# Altium PCB PCB1.PcbDoc
Units mm, origin at the board's own origin, x right, y up, seen from the top; angles counter-clockwise.
Board outline 76.58 x 73.41 mm, 2 copper layers (Top Layer, Bottom Layer); 10 components, 9 nets, 67 pads, 4 vias.
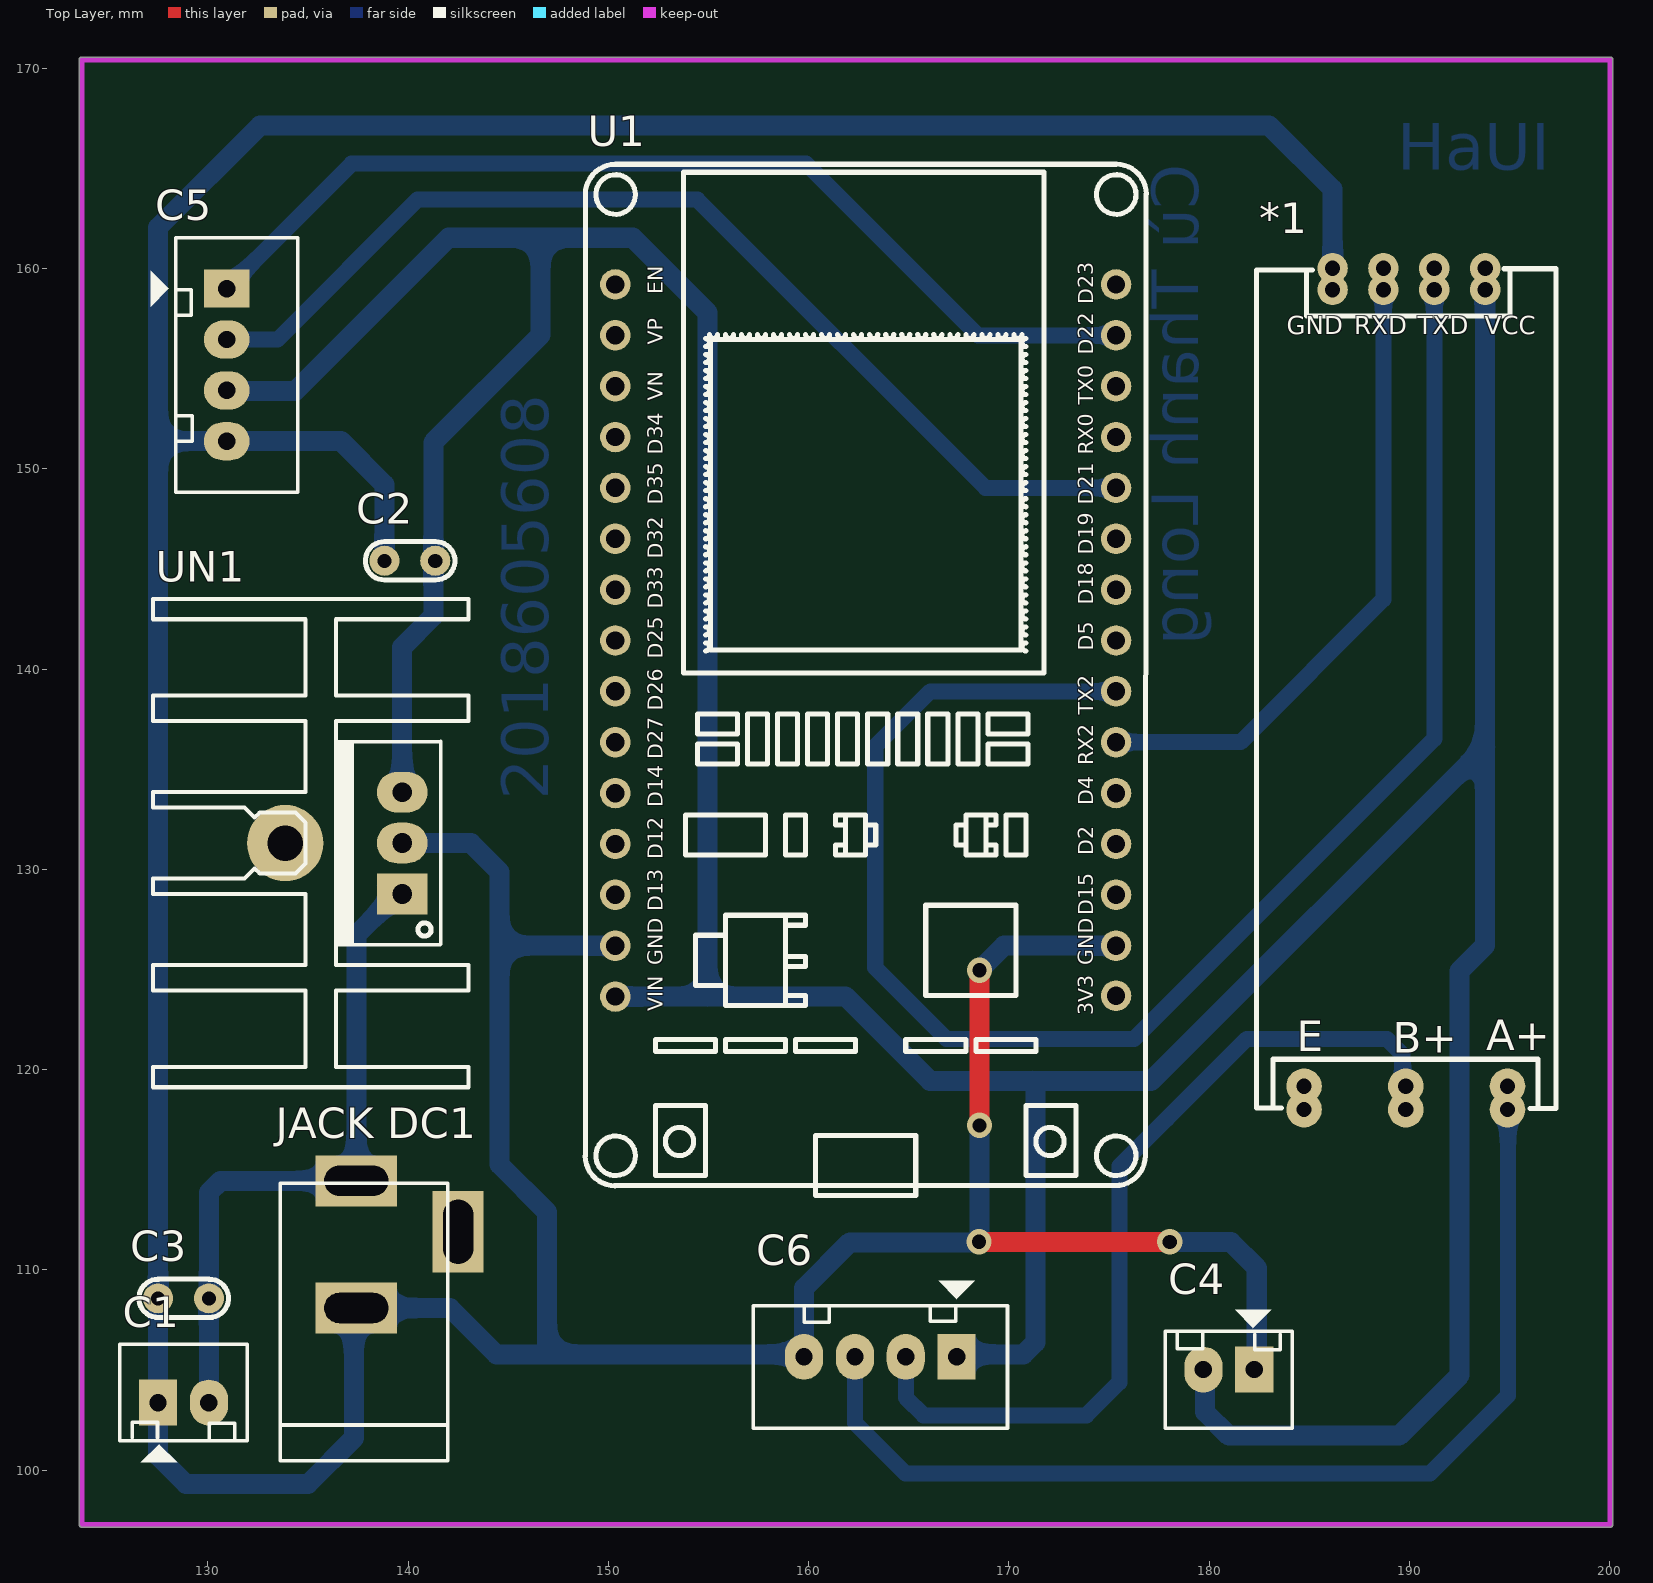
[diagram p0: Top Layer view]
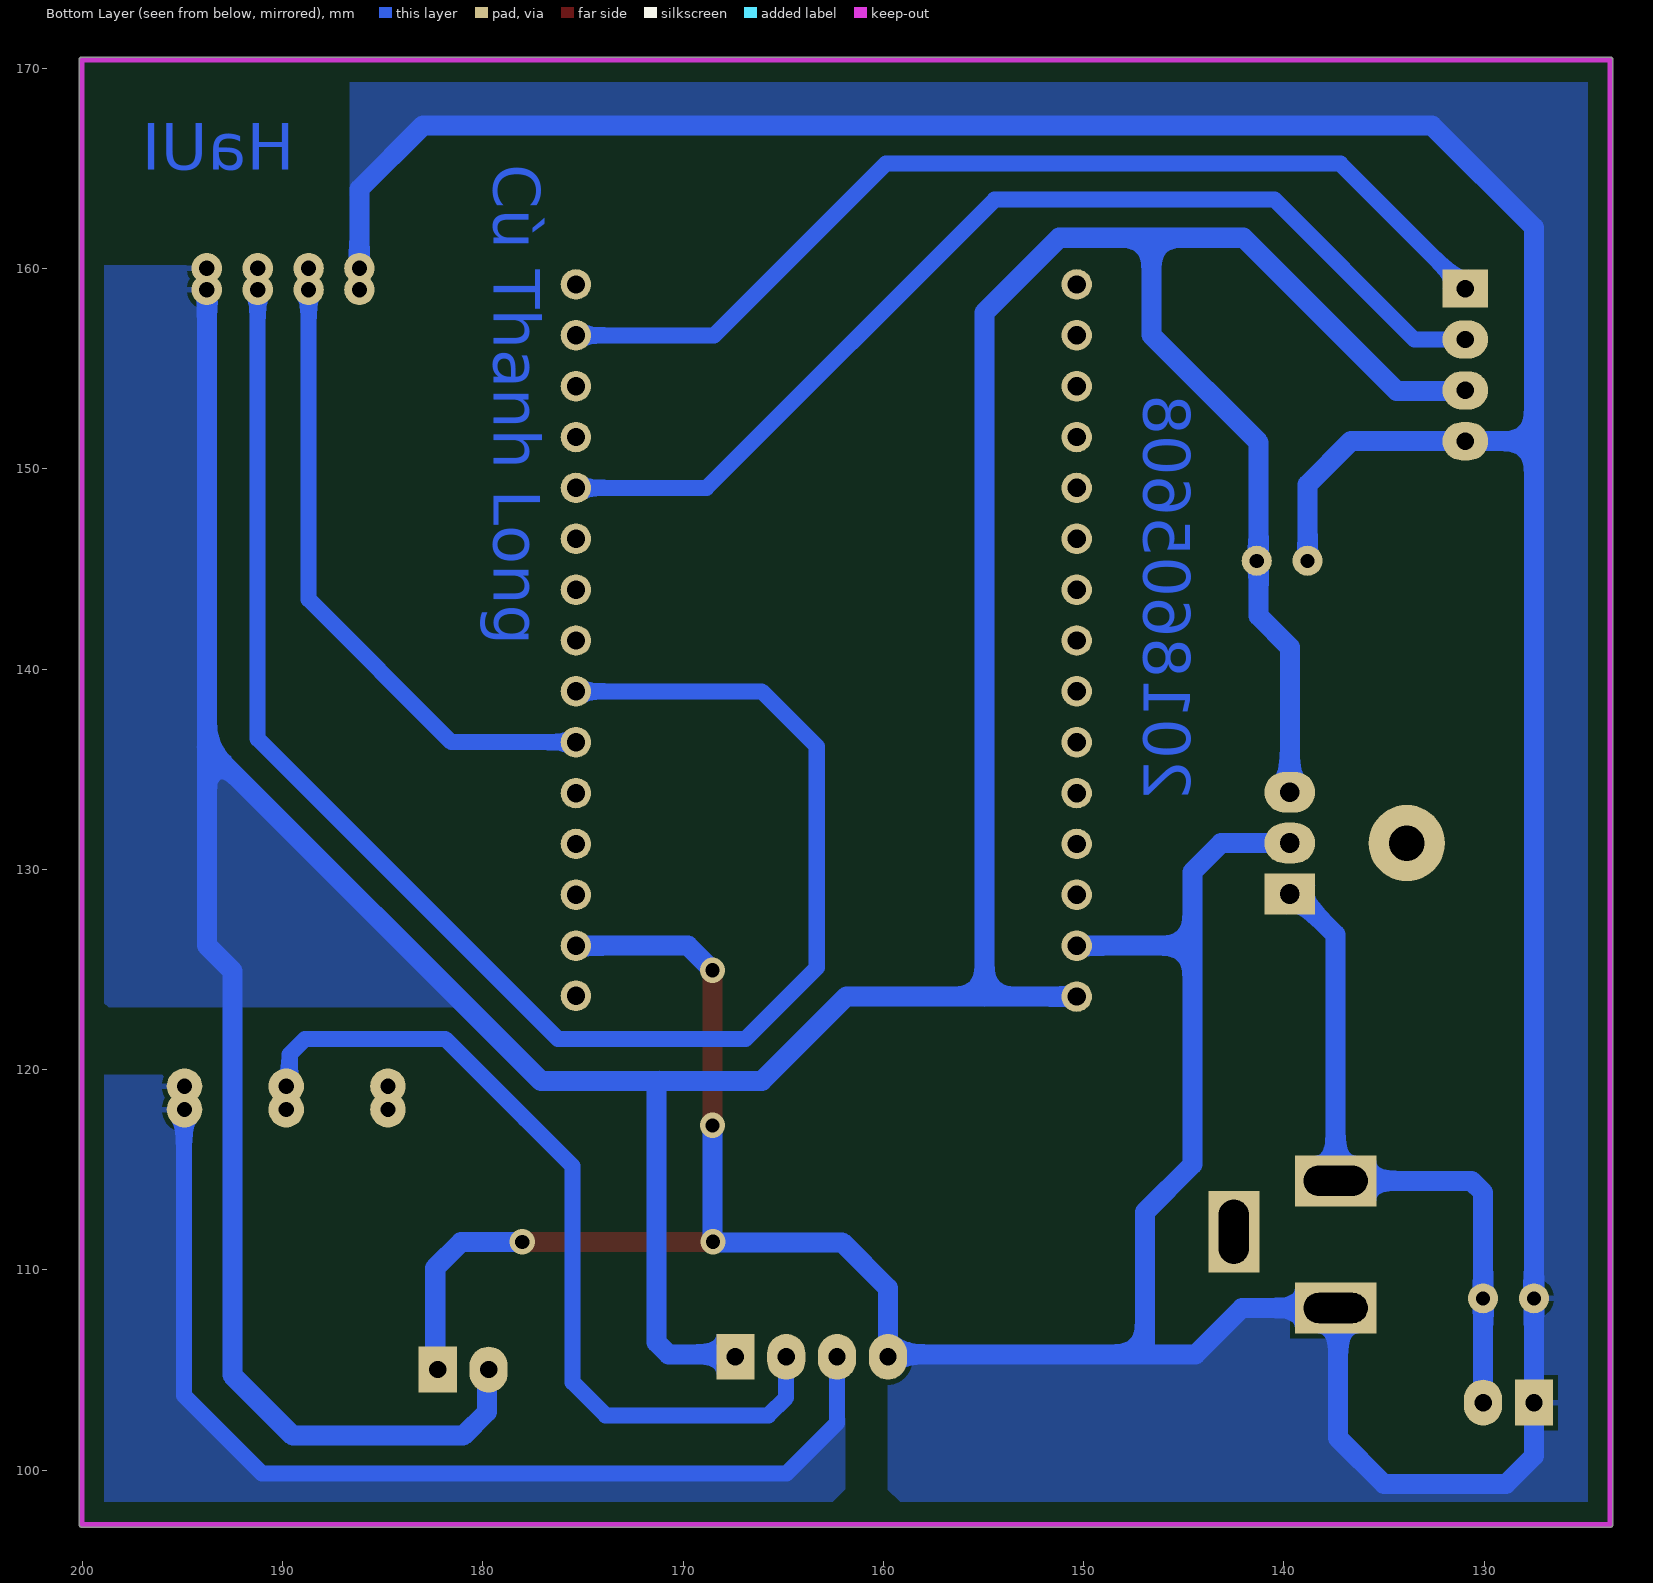
[diagram p1: Bottom Layer view, seen from below]

## Layer stack, top to bottom
Top Solder: solder mask 0.0102, Solder Resist, Dk 3.5
Top Layer: signal copper 0.0356
Dielectric 1: dielectric 0.32, FR-4, Dk 4.8
Bottom Layer: signal copper 0.0356
Bottom Solder: solder mask 0.0102, Solder Resist, Dk 3.5

## Board outline
123.571,97.282 123.571,170.434 cw(c123.698,170.434) 123.698,170.561 200.025,170.561 cw(c200.025,170.434) 200.152,170.434 200.152,97.282 cw(c200.025,97.282) 200.025,97.155 123.698,97.155 cw(c123.698,97.282)

## Design rules (kind name [scope] priority, off if disabled: settings)
Clearance [All] p1: gap=1 ignorepadtopadclearanceinfootprint=FALSE
PolygonConnect [All] p1: connectstyle=Relief reliefconductorwidth=0.254 reliefentries=4 polygonreliefangle="90 Angle" airgapwidth=0.254
RoutingVias [All] p1: holewidth=0.711 width=1.27 viastyle="Through Hole" minholewidth=0.711 minwidth=1.27 maxholewidth=0.711 maxwidth=1.27
SolderMaskExpansion [All] p1: expansion=0.102 istentingtop=FALSE
Width VCC5 [InNet('VCC5')] p1: maxlimit=1 minlimit=1 preferedwidth=1
Width VCC_IN [InNet('VCC_IN')] p2: maxlimit=1 minlimit=1 preferedwidth=1
Width VCC33 [InNet('VCC5')] p3: maxlimit=1 minlimit=1 preferedwidth=1
Width GND [InNet('GND')] p4: maxlimit=1 minlimit=1 preferedwidth=1
Width [All] p5: maxlimit=0.8 minlimit=0.8 preferedwidth=0.8
30 further rules are at their usual default settings.

## Components (designator, comment, footprint, x,y, rotation, side; value= is the part's Value field where it differs from the comment)
*1 "TTL_RS485" "RS-485 Module" 189.497,136.906 r270 top
C1 "Header2" Header2 127.508,103.378 r0 top
C2 "104" "tu gom" 140.081,145.415 r180 top
C3 "104" "tu gom" 128.778,108.585 r180 top
C4 "Header2" Header2 182.245,105.029 r180 top
C5 "LCD_I2C" Header4 130.937,159.004 r270 top
C6 "LCD_I2C" Header4 167.386,105.664 r180 top
"JACK DC1" "JACK DC 5.5" "JACK DC 5.5" 139.954,111.277 r90 top value="Jac DC"
U1 "ESP32_MODULE copy" ESP32-WIFIMODULE-FOOTPRINT 164.973,139.7 r0 top
UN1 "L78M05CP" QTO-220H2 139.7,131.318 r90 top

## Footprints (in the part's own frame and the unit in brackets; to place one, negate y for a bottom-side part, rotate by r counter-clockwise, add the part's x,y. Pads: shape width x height; smd on the part's side, far side on the other; paste and mask are expansions set on the pad)
ESP32-WIFIMODULE-FOOTPRINT [mil]
  round 60 hole 36: 1(-575.9,768.25) 2(-575.9,668.25) 3(-575.9,568.25) 4(-575.9,468.25) 5(-575.9,368.25) 6(-575.9,268.25) 7(-575.9,168.25) 8(-575.9,68.25) 9(-575.9,-31.75) 10(-575.9,-131.75) 11(-575.9,-231.75) 12(-575.9,-331.75) 13(-575.9,-431.75) 14(-575.9,-531.75) 15(-575.9,-631.75) 16(408.35,-630.18) 17(408.35,-531.75) 18(408.35,-431.75) 19(408.35,-331.75) 20(408.35,-231.75) 21(408.35,-131.75) 22(408.35,-31.75) 23(408.35,68.25) 24(408.35,168.25) 25(408.35,268.25) 26(408.35,368.25) 27(408.35,468.25) 28(408.35,568.25) 29(408.35,668.25) 30(408.35,768.25)
  silkscreen extent -635,-1023 468,1005
Header2 [mil] "CON2"
  rect 75x90 hole 34: 1(0,0)
  oval 75x90 hole 34: 2(100,0)
  silkscreen extent -75,-118 175,115, body extent -68,-70 168,107, height 236
Header4 [mil] "CON4"
  rect 75x90 hole 34: 1(0,0)
  oval 75x90 hole 34: 2(100,0) 3(200,0) 4(300,0)
  silkscreen extent -100,-150 400,140, body extent -90,-90 398,136, height 276
"JACK DC 5.5" [mm] "Jac DC input"
  rect 2.54x4.064 hole 1.5 slot 3.2 at 90 deg: 1(3.175,2.54) 2(-3.175,2.54)
  rect 4.064x2.54 hole 1.5 slot 3.2 at 0 deg: 3(0.635,-2.54)
  silkscreen extent -10.79,-2.03 3.05,6.35, body extent -10.42,-2.67 3.4,6.84, height 11.02
QTO-220H2 [mil] "TO-220 - 1-2-3"
  round 150 hole 70: 0(0,230)
  rect 80x100 hole 39: 1(-100,0)
  oval 80x100 hole 39: 2(0,0) 3(100,0)
  silkscreen extent -480,-130 480,490, body extent -449,-177 453,469, height 1206
"RS-485 Module" [mil] "RS-485 TTL Module"
  round 60 hole 30: 1(-910,168.5) 1(-868,168.5) 2(-910,68.5) 2(-868,68.5) 3(-910,-31.5) 3(-868,-31.5) 4(-910,-131.5) 4(-868,-131.5)
  round 70 hole 30: 5(698,-187.5) 5(744,-187.5) 6(698,12.5) 6(744,12.5) 7(698,212.5) 7(744,212.5)
  silkscreen extent -909,-281 742,308, body extent -949,-282 808,310, height 110
"tu gom" [mm] "Tu gom mini"
  round 1.5 hole 0.7: 1(-1.27,0) 2(1.27,0)
  silkscreen extent -2.25,-0.97 2.22,0.97, body extent -2.92,-0.85 2.92,0.85, height 6.12

## Part data
C1 C4: "Header IDC, 2 x 1 Pin Vertical 2.54mm Pitch (Non-Boxed, Male)", Manufacturer="W¨¹rth Elektronik eiSos GmbH", partNo=613002143121, ComponentLink1 Description=Manufacturer, ComponentLink1URL=http://www.we-online.com, ComponentLink2 Description=Datasheet, ComponentLink2URL=http://katalog.we-online.de/em/datasheet/6130xx143121.pdf, Created by="Karrer Zheng", Created Date="29 March 2013", NoPins=02
C2 C3: library part "Tu gom 104 50V", "Cắm", Chung_Loai=Cắm, Don_Vi=Con, Ma_Hang=MH004761, So_Chan=2, Ten_Linh_Kien="Tụ gốm 104 100nF 50V"
C5 C6: library part Header4, "Header IDC, 4 x 1 Pin Vertical 2.54mm Pitch (Non-Boxed, Male)", Manufacturer="W¨¹rth Elektronik eiSos GmbH", partNo=613002143121, ComponentLink1 Description=Manufacturer, ComponentLink1URL=http://www.we-online.com, ComponentLink2 Description=Datasheet, ComponentLink2URL=http://katalog.we-online.de/em/datasheet/6130xx143121.pdf, Created by="Karrer Zheng", Created Date="29 March 2013", NoPins=02
UN1: "Positive Voltage Regulator", ComponentLink1Description="Manufacturer Link", ComponentLink1URL=http://www.st.com/, ComponentLink2Description=Datasheet, ComponentLink2URL=http://www.st.com/stonline/products/literature/ds/2146/l78m05c.pdf, DatasheetVersion=Apr-1994, LatestRevisionDate=17-Jul-2002, LatestRevisionNote="Re-released for DXP Platform.", Note="Tab is connected to pin 3 (GND).", PackageDescription="TO, Thru-Hole, Vertical, Heatsink Mounted; 3 In-Line Leads; Pitch 2.54 mm; Pin sequence 1, 3, 2", PackageReference=ISOWATT220AB, PackageVersion=Jul-1998, Published=24-Aug-2001, Publisher="Altium Limited"

## Via types
v1: diameter 1.27, hole 0.711, Top Layer to Bottom Layer, 4 vias

## Nets (pads, with @x,y where several pads share a name; then routed paths per layer and width w, separated by ;. In a path a pad name is that pad's centre, name@x,y a point inside that pad or via, vN(x,y) a via of type N, cw(c..) or ccw(c..) an arc to the next point about the centre after c; other vN are vias at no path point)
GND: "JACK DC1.2" *1.4 C1.1 C2.2 C3.2 C4.1 C5.4 C6.4 U1.14 U1.17 UN1.2 | length 274.5
  Top Layer w1: v1(168.503,111.405) 168.506,111.402 178.031,111.402 v1(178.033,111.4) ; v1(168.529,117.221) v1(168.529,124.968)
  Bottom Layer w1: C2.2 138.811,149.225 136.652,151.384 C5.4 127.508,151.384 ; UN1.2 143.129,131.318 144.562,129.885 144.562,126.194 ; 146.939,105.791 159.639,105.791 C6.4 159.766,109.093 162.052,111.379 168.477,111.379 v1(168.503,111.405) 168.529,111.431 v1(168.529,117.221) ; U1.14 144.562,126.194 ; v1(168.529,124.968) 169.755,126.194 U1.17 ; v1(178.033,111.4) 181.081,111.4 182.372,110.109 182.372,105.156 C4.1 ; *1.4@186.157,160.02 186.157,163.982 182.995,167.144 132.6,167.144 127.508,162.052 127.508,151.384 ; 127.508,151.384 C3.2 C1.1 127.508,100.711 128.905,99.314 135.001,99.314 137.287,101.6 137.287,107.975 137.414,108.102 142.088,108.102 144.407,105.783 146.939,105.783 146.939,112.891 144.562,115.268 144.562,126.194
RS485_A+: *1.7 C6.3 | length 52.9
  Bottom Layer w0.8: C6.3 162.306,102.362 164.841,99.827 191.013,99.827 194.92,103.734 194.92,117.983 *1.7@194.894,118.008
RS485_B-: *1.6 C6.2 | length 45
  Bottom Layer w0.8: C6.2@164.846,106.254 164.846,103.632 165.735,102.743 173.863,102.743 175.514,104.394 175.514,115.185 177.872,117.544 177.889,117.544 181.884,121.539 188.874,121.539 189.645,120.768 189.645,119.346 189.814,119.177 *1.6@189.814,118.008
RX2: *1.3 U1.21 | length 31.8
  Bottom Layer w0.8: U1.21 181.566,136.354 188.697,143.485 *1.3@188.697,158.953
SCL: C5.1 U1.29 | length 50.7
  Bottom Layer w0.8: C5.1 131.127,159.004 131.68,159.556 131.68,159.747 137.177,165.244 159.876,165.244 168.446,156.674 U1.29
SDA: C5.2 U1.26 | length 53.3
  Bottom Layer w0.8: C5.2 133.477,156.464 140.457,163.444 154.437,163.444 168.827,149.054 U1.26
TX2: *1.2 U1.22 | length 82.2
  Bottom Layer w0.8: U1.22 166.072,138.894 163.322,136.144 163.322,125.095 166.886,121.531 176.241,121.531 191.237,136.528 *1.2@191.237,158.953
VCC5: *1.1 C2.1 C4.2 C5.3 C6.1 U1.15 UN1.3 | length 234.3
  Bottom Layer w1: C5.3 130.968,153.893 134.36,153.893 142.011,161.544 146.612,161.544 ; UN1.3 139.7,141.097 141.255,142.652 141.255,145.319 C2.1 141.255,145.511 141.255,151.327 146.612,156.684 146.612,161.544 ; U1.15 154.94,123.654 ; C6.1 167.711,105.664 167.838,105.791 170.727,105.791 171.313,106.377 171.313,119.327 171.196,119.444 ; C4.2 179.792,104.942 179.792,102.91 180.975,101.727 189.484,101.727 192.505,104.748 192.505,124.941 193.777,126.213 193.777,136.119 ; *1.1@193.777,158.953 193.777,136.119 ; 146.612,161.544 151.213,161.544 154.94,157.817 154.94,123.654 ; 154.94,123.654 161.842,123.654 166.053,119.444 171.196,119.444 ; 171.196,119.444 177.102,119.444 193.777,136.119
VCC_IN: "JACK DC1.1" C1.2 C3.1 UN1.1 | length 33
  Bottom Layer w1: C1.2 C3.1@130.048,108.107 ; C3.1 130.048,113.867 130.634,114.452 137.414,114.452 137.414,126.746 139.446,128.778 UN1.1
pads on no net: "JACK DC1.3" *1.5 U1.1 U1.2 U1.3 U1.4 U1.5 U1.6 U1.7 U1.8 U1.9 U1.10 U1.11 U1.12 U1.13 U1.16 U1.18 U1.19 U1.20 U1.23 U1.24 U1.25 U1.27 U1.28 U1.30 UN1.0

## Polygon pours and split planes (outlines as drawn)
RS485_A+ on Bottom Layer "RS485_A+_L02_P004" (solid, pour order 4): 161.9,99.06 162.535,98.425 200.076,98.425 200.076,119.761 195.478,119.761 194.894,119.177 194.92,119.151 194.92,103.734 191.013,99.827 164.841,99.827 161.9,102.768
VCC5 on Bottom Layer "VCC5_L02_P002" (solid, pour order 2): 193.777,160.172 200,160.172 200,124.435 198.679,123.114 185.725,123.114 180.746,123.114 193.751,136.119 193.777,136.119
GND on Bottom Layer "GND_L02_P001" (solid, pour order 1): 186.639,170.434 123.673,170.434 123.673,97.307 158.039,97.307 159.766,99.035 159.766,105.664 144.526,105.664 142.088,108.102 137.414,108.102 137.287,107.975 137.287,101.6 135.001,99.314 128.905,99.314 127.508,100.711 127.508,162.052 132.6,167.144 182.995,167.144 186.639,163.5

## Keep-outs
Keep-Out Layer:
  lines w0.254: 123.698,97.282 123.698,170.434 200.025,170.434 200.025,97.282 123.698,97.282

## Other copper
Bottom Layer:
  text "Cù Thanh Long" at 180.22,165.227 h4 r90
  text "HaUI" at 189.382,164.154 h4
  text "2018605608" at 147.78,133.477 h4 r90

## Text inside footprints (layer, text, board x,y; h text height)
*1: Top Overlay "E" at 184.379,120.929 h1.52; Top Overlay "B+" at 189.154,120.853 h1.52; Top Overlay "A+" at 193.827,120.98 h1.52; Top Overlay "GND" at 183.871,156.439 h1.52; Top Overlay "VCC" at 193.751,156.439 h1.52; Top Overlay "TXD" at 190.424,156.439 h1.52; Top Overlay "RXD" at 187.249,156.439 h1.52
U1: Top Overlay "VIN" at 152.72,122.913 h0.75 r90; Top Overlay "GND" at 152.72,125.213 h0.75 r90; Top Overlay "D13" at 152.72,127.913 h0.75 r90; Top Overlay "D12" at 152.72,130.513 h0.75 r90; Top Overlay "D14" at 152.72,133.114 h0.75 r90; Top Overlay "D27" at 152.72,135.514 h0.75 r90; Top Overlay "D26" at 152.72,137.913 h0.75 r90; Top Overlay "D25" at 152.72,140.514 h0.75 r90; Top Overlay "D33" at 152.72,143.013 h0.75 r90; Top Overlay "D32" at 152.72,145.514 h0.75 r90; Top Overlay "D35" at 152.72,148.214 h0.75 r90; Top Overlay "D34" at 152.72,150.713 h0.75 r90; Top Overlay "VN" at 152.72,153.413 h0.75 r90; Top Overlay "VP" at 152.72,156.214 h0.75 r90; Top Overlay "EN" at 152.72,158.713 h0.75 r90; Top Overlay "3V3" at 174.22,122.714 h0.75 r90; Top Overlay "GND" at 174.22,125.213 h0.75 r90; Top Overlay "D15" at 174.22,127.714 h0.75 r90; Top Overlay "D2" at 174.22,130.714 h0.75 r90; Top Overlay "D4" at 174.22,133.213 h0.75 r90; Top Overlay "RX2" at 174.22,135.213 h0.75 r90; Top Overlay "TX2" at 174.22,137.714 h0.75 r90; Top Overlay "D5" at 174.22,140.913 h0.75 r90; Top Overlay "D18" at 174.22,143.213 h0.75 r90; Top Overlay "D19" at 174.22,145.713 h0.75 r90; Top Overlay "D21" at 174.22,148.214 h0.75 r90; Top Overlay "RX0" at 174.22,150.713 h0.75 r90; Top Overlay "TX0" at 174.22,153.214 h0.75 r90; Top Overlay "D22" at 174.22,155.713 h0.75 r90; Top Overlay "D23" at 174.22,158.214 h0.75 r90